# Altium PCB ESP-RC-Car.PcbDoc (part 2 of 2)
Units mm, origin at the board's own origin, x right, y up, seen from the top; angles counter-clockwise.
Board outline 95.25 x 60.25 mm, 4 copper layers (Top Layer, Int1 (Signal), Int2 (GND), Bottom Layer(PWR)), stack 1.586 mm thick; 116 components, 100 nets, 419 pads, 832 vias.
Unrouted connection lines stored in the file: 3.
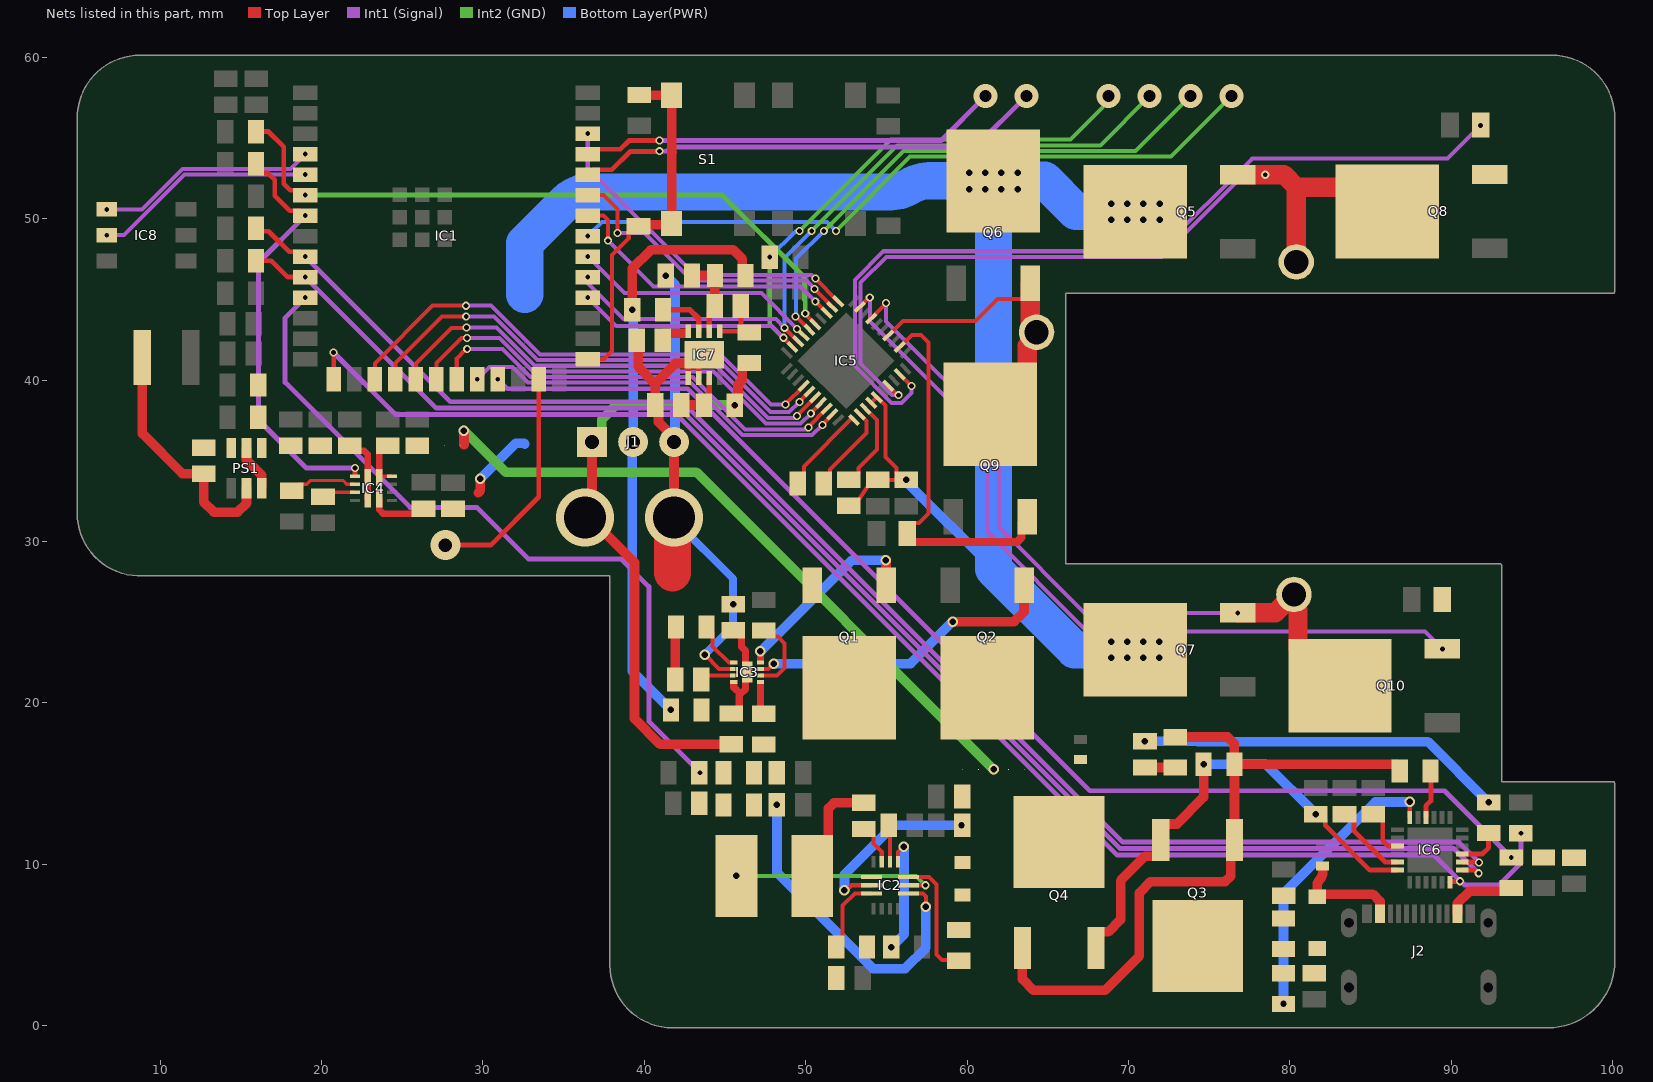
[diagram p4: the nets of this part, all layers, seen from the top]

## Via types
v1: diameter 0.5, hole 0.3, Top Layer to Bottom Layer(PWR), tented both sides, 751 vias
v2: diameter 0.65, hole 0.4, Top Layer to Bottom Layer(PWR), tented both sides, 63 vias
v3: diameter 1.5, hole 0.75, Top Layer to Bottom Layer(PWR), 8 vias
v4: diameter 5, hole 3.4, Top Layer to Bottom Layer(PWR), 5 vias
v5: diameter 1.85, hole 0.85, Top Layer to Bottom Layer(PWR), 3 vias
v6: diameter 3.6, hole 2.6, Top Layer to Bottom Layer(PWR), 2 vias

## Nets (pads, with @x,y where several pads share a name; then routed paths per layer and width w, separated by ;. In a path a pad name is that pad's centre, name@x,y a point inside that pad or via, vN(x,y) a via of type N, cw(c..) or ccw(c..) an arc to the next point about the centre after c; other vN are vias at no path point) (continued)
INHA: IC1.17 IC5.34 | length 32.1
  Top Layer w0.25: IC1.17@23.305,40.05 23.305,41.04 26.875,44.61 v1(28.95,44.61) ; v1@48.75,38.511 IC5.34@49.889,39.649
  Int1 (Signal) w0.25: v1(28.95,44.61) 30.51,44.61 33.53,41.59 44.74,41.59 47.841,38.489 v1(48.75,38.489)
INHB: IC1.19 IC5.36 | length 29.5
  Top Layer w0.25: IC1.19@25.845,40.05 25.845,41.035 28.051,43.241 28.961,43.241 v1(28.99,43.27) ; v1@49.455,37.801 IC5.36@50.596,38.942
  Int1 (Signal) w0.25: v1(28.99,43.27) 30.86,43.27 33.24,40.89 44.45,40.89 47.676,37.664 49.34,37.664 v1(49.455,37.779)
INHC: IC1.21 IC5.38 | length 27.1
  Top Layer w0.25: IC1.21@28.385,40.05 28.385,41.33 28.91,41.855 28.914,41.855 28.989,41.93 v1(29.03,41.93) ; v1(50.175,37.075) 50.175,37.107 IC5.38@51.303,38.235
  Int1 (Signal) w0.25: v1(29.03,41.93) 31.21,41.93 32.95,40.19 43.005,40.19 46.241,36.954 50.054,36.954 50.127,37.027 v1(50.175,37.075)
INLA: IC1.18 IC5.35 | length 30.9
  Top Layer w0.25: IC1.18@24.575,40.05 24.575,41.055 27.46,43.94 v1(28.97,43.94) ; v1(49.61,38.642) 49.61,38.664 IC5.35@50.242,39.296
  Int1 (Signal) w0.25: v1(28.97,43.94) 30.685,43.94 33.385,41.24 44.595,41.24 47.821,38.014 48.982,38.014 v1(49.61,38.642)
INLB: IC1.20 IC5.37 | length 28.2
  Top Layer w0.25: IC1.20@27.115,40.05 27.115,41.05 28.665,42.6 v1(29.01,42.6) ; v1(50.319,37.937) 50.319,37.959 IC5.37@50.949,38.589
  Int1 (Signal) w0.25: v1(29.01,42.6) 31.035,42.6 33.095,40.54 44.304,40.54 47.54,37.304 49.686,37.304 v1(50.319,37.937)
INLC: IC1.23 IC5.39 | length 24.6
  Top Layer w0.25: v1(51.034,37.227) 51.034,37.259 IC5.39@51.656,37.882
  Int1 (Signal) w0.25: v1(29.655,40.05) 30.425,40.82 31.825,40.82 32.805,39.84 42.86,39.84 46.1,36.6 50.407,36.6 v1(51.034,37.227)
IO0: C6.2 IC1.27 R2.2 S1.1 S1.3 | length 22.4
  Top Layer w0.25: IC1.27@36.5,41.3 36.501,41.301 37.506,41.301 37.995,41.79 37.995,47.745 39.04,48.79 39.04,49.155 39.425,49.54 C6.2@39.459,49.54
  Top Layer w0.6: C6.2@39.459,49.54 39.539,49.62 41.62,49.62 S1.1@41.7,49.7 41.7,54.095 41.72,54.115 41.7,54.135 S1.3@41.7,57.65 41.693,57.657 39.693,57.657 R2.2@39.686,57.664
LEDC: IC1.5 IC8.5 | length 13.9
  Int1 (Signal) w0.25: v1(6.7,48.98) 7.78,48.98 11.53,52.73 v1(19,52.73)
LEDD: IC1.4 IC8.4 | length 13.7
  Int1 (Signal) w0.25: v1(6.7,50.58) 8.885,50.58 11.385,53.08 18.08,53.08 v1(19,54)
MISO_DRV: IC1.33 IC5.26 | length 77.3
  Top Layer w0.25: v1(49.375,43.95) 49.406,43.95 IC5.26@50.242,43.114
  Int2 (GND) w0.25: v1(51.125,49.25) 56.075,54.2 70.443,54.2 v3(73.838,57.595) ; v1(51.875,49.25) 56.475,53.85 72.633,53.85 v3(76.378,57.595)
  Bottom Layer(PWR) w0.25: v1(36.5,48.92) 37.375,49.795 51.33,49.795 v1(51.875,49.25) ; v1(49.375,43.95) 49.4,43.975 49.4,47.525 v1(51.125,49.25)
MOSI_DRV: IC1.32 IC5.27 | length 15.4
  Top Layer w0.25: v1(49.474,43.175) IC5.27@49.889,42.761
  Int1 (Signal) w0.25: v1@36.515,47.665 38.78,45.4 47.251,45.4 v1@49.474,43.176
  other v1: 36.5,47.65
NetC5_1: C5.1 PS1.6
NetC5_2: C5.2 L1.2 PS1.2 | length 15.4
  Top Layer w0.6: L1.2@8.9,41.4 8.9,36.695 11.395,34.2 C5.2@12.705,34.2 12.705,32.445 13.33,31.82 14.805,31.82 15.355,32.37 PS1.2@15.355,33.3
NetC7_1: C7.1 IC2.14 | length 2.3
  Top Layer w0.25: C7.1@55.15,12.42 55.215,12.355 IC2.14@55.215,10.155
NetC9_2: C9.2 IC2.3 R3.2 | length 4.8
  Top Layer w0.25: R3.2@51.895,4.88 52.27,5.48 52.27,7.326 cw(c52.52,7.326) 52.343,7.503 53.045,8.205 IC2.3@54.065,8.205
NetC11_1: C11.1 IC2.15 | length 2.6
  Top Layer w0.25: C11.1@53.6,12.19 53.825,12.19 54.21,11.805 54.21,11.659 54.21,11.285 54.715,10.78 IC2.15@54.715,10.155
NetC11_2: C11.2 IC2.1 L2.2 | length 6.9
  Top Layer w0.6: L2.2@50.41,9.28 51.41,10.28 51.41,13.459 51.761,13.81 C11.2@53.6,13.81
NetC12_2: C12.2 C13.2 IC2.2 LED1.2 R30.2 | length 11.3
  Top Layer w0.25: v2(52.405,8.39) 52.513,8.39 52.828,8.705 IC2.2@54.065,8.705
  Bottom Layer(PWR) w0.6: v2(52.405,8.39) 52.405,9.375 55.45,12.42 v2(59.656,12.42)
NetC14_2: C14.2 IC3.8 IC3.9 R10.1 | length 7
  Top Layer w0.45: R10.1@45.385,19.34 45.61,19.34 45.885,19.615 45.885,20.466 45.97,20.551 ; C14.2@45.51,24.49 45.735,24.49 46.02,24.205 46.02,23.485 46.275,23.23 46.275,22.005 IC3.9@46.375,21.905 46.275,21.805 46.275,20.856 45.97,20.551 ; IC3.8@45.55,21.185 45.55,20.971 45.97,20.551
NetC17_2: C17.2 IC3.7 R13.1 | length 2.1
  Top Layer w0.25: C17.2@43.54,21.455 43.925,21.705 45.45,21.705 IC3.7@45.55,21.705
NetC19_1: C19.1 D3.1 Q4.2 R20.2 R33.2 | length 22.9
  Bottom Layer(PWR) w0.6: v2(71.02,17.62) 74.281,17.62 74.301,17.6 88.545,17.6 v2(92.31,13.835)
NetC19_2: C19.2 R21.1 | length 1.9
  Top Layer w0.6: C19.2@71.02,16 71.025,15.995 72.905,15.995 R21.1@72.91,15.99
NetC20_1: C20.1 C21.1 IC4.6 IC4.7 R32.1 | length 3.1
  Top Layer w0.2: IC4.7@23.575,33.975 23.65,34.05 IC4.6@24.375,34.05
  Top Layer w0.4: IC4.7@23.575,33.975 23.575,35.63 23.885,35.94 C21.1@24.069,35.94
NetC22_2: C22.2 IC6.24 Q3.3 Q4.3 R19.2 | length 30.1
  Top Layer w0.3: C22.2@81.83,13.11 82.19,12.75 82.19,12.41 84.96,9.64 IC6.24@86.68,9.64
  Top Layer w0.6: Q4.3@67.995,4.82 67.995,5.59 68.225,5.82 68.755,5.82 69.52,6.585 69.52,8.991 71.034,10.505 71.773,10.505 72.003,10.735 72.003,12.275 72.233,12.505 73.003,12.505 74.66,14.162 v2(74.66,16.21)
  Bottom Layer(PWR) w0.6: v2(74.66,16.21) 78.505,16.21 v2(81.605,13.11)
NetC23_1: C23.1 C24.1 IC4.1 IC4.8 R34.2 | length 4.1
  Top Layer w0.4: C24.1@21.75,35.94 22.06,35.63 22.641,35.63 22.875,35.396 IC4.1@22.875,32.625
NetC25_1: C25.1 D1.1 R18.1 R22.2
NetC26_1: C26.1 IC6.23 | length 4.9
  Top Layer w0.3: C26.1@83.385,13.11 83.61,13.11 83.97,12.75 83.97,12.095 85.925,10.14 IC6.23@86.68,10.14
NetC27_1: C27.1 C28.1 IC4.2 R35.2 | length 3.6
  Top Layer w0.4: IC4.2@23.575,32.625 23.575,31.969 23.809,31.735 26.02,31.735 C28.1@26.325,32.04
NetC29_2: C29.2 IC6.21 | length 3.1
  Top Layer w0.3: C29.2@85.165,13.11 85.39,13.11 85.75,12.75 85.75,11.465 86.075,11.14 IC6.21@86.68,11.14
NetC30_2: C30.2 IC4.11 | length 2.1
  Top Layer w0.2: C30.2@20.1,32.65 20.5,33.05 IC4.11@22.075,33.05
NetC31_1: C31.1 IC5.2 | length 5.6
  Top Layer w0.25: C31.1@51.12,33.595 51.505,33.98 51.505,34.46 53.77,36.725 53.77,37.465 IC5.2@53.354,37.882
NetC31_2: C31.2 IC5.1 | length 5.6
  Top Layer w0.25: C31.2@49.5,33.595 49.885,33.98 49.885,34.65 52.882,37.647 IC5.1@53,37.528
NetC32_2: C32.2 IC5.3 | length 5.6
  Top Layer w0.25: C32.2@52.675,33.825 52.9,33.825 53.285,34.21 53.285,34.555 54.425,35.695 54.425,37.517 IC5.3@53.707,38.235
NetC37_1: C37.1 C38.2 IC7.2 R41.1 | length 5
  Top Layer w0.35: IC7.2@44.03,43.03 44.03,44.205 C37.1@44.37,44.545 ; C37.1@44.365,44.595 C37.1@44.37,44.6 ; R41.1@44.37,46.48 R41.1@44.375,46.485
  Top Layer w0.6: C38.2@42.96,46.48 42.962,46.483 44.373,46.483 R41.1@44.375,46.485 ; C37.1@44.37,44.6 R41.1@44.37,46.48
NetC37_2: C37.2 IC7.1 R39.1 | length 3.8
  Top Layer w0.3: IC7.1@44.68,43.03 46.43,43.03 R39.1@46.505,42.955 46.335,42.955 45.985,43.305 C37.2@45.985,44.595
NetC39_2: C39.2 IC7.4 | length 1.4
  Top Layer w0.6: C39.2@41.245,42.905 IC7.4@42.6,42.905
NetC40_2: C40.2 IC7.7 R40.2 | length 3.2
  Top Layer w0.35: R40.2@43.705,38.455 44.03,38.78 IC7.7@44.03,40.13
  Top Layer w0.6: C40.2@42.295,38.465 42.3,38.46 43.7,38.46 R40.2@43.705,38.455
NetIC2_10: IC2.10 L2.1 R6.1 | length 13
  Top Layer w0.25: IC2.10@56.365,8.705 v1(57.415,8.705)
  Int2 (GND) w0.25: v2(45.71,9.28) 56.84,9.28 v1(57.415,8.705)
NetIC2_11: IC2.11 R8.1 | length 7.8
  Top Layer w0.25: IC2.11@56.365,9.205 57.645,9.205 58.1,8.75 58.1,4.415 58.451,4.064 59.461,4.064 R8.1@59.495,4.03
NetIC2_13: IC2.13 R3.1 R4.2 | length 7.7
  Top Layer w0.25: IC2.13@55.715,10.155 55.715,10.764 56.046,11.095 v2(56.09,11.095)
  Bottom Layer(PWR) w0.6: v2(55.31,4.875) 55.31,4.889 56.09,5.669 v2(56.09,11.095)
NetIC3_1: IC3.1 R12.1 | length 1.9
  Top Layer w0.45: IC3.1@47.2,21.19 47.2,19.525 R12.1@47.395,19.33
NetIC3_2: IC3.2 R16.2 | length 4.8
  Top Layer w0.25: IC3.2@47.2,21.705 48.23,21.705 48.695,22.17 48.695,23.695 48.283,24.107 47.773,24.107 R16.2@47.4,24.48
NetIC3_3: IC3.3 Q2.1 | length 19.4
  Top Layer w0.25: IC3.3@47.2,22.105 47.684,22.105 48.009,22.43 v2(48.015,22.43)
  Top Layer w0.6: v2(59.1,25.035) 62.92,25.035 63.526,25.641 63.526,27.281 Q2.1@63.535,27.29
  Bottom Layer(PWR) w0.6: v2(48.015,22.43) 56.495,22.43 v2(59.1,25.035)
NetIC3_4: IC3.4 Q1.1 | length 12.2
  Top Layer w0.45: 47.2,22.63 v2(47.2,23.19)
  Top Layer w0.6: v2(54.97,28.84) 54.977,28.833 54.977,27.297 Q1.1@54.985,27.29
  Bottom Layer(PWR) w0.6: v2(47.2,23.19) 52.85,28.84 v2(54.97,28.84)
NetIC3_5: IC3.5 Q1.3 R17.1 | length 3.1
  Top Layer w0.25: R17.1@43.865,24.705 44.24,24.33 44.24,23.51 45.245,22.505 IC3.5@45.55,22.505
NetIC4_10: IC4.10 R24.2 | length 4.3
  Top Layer w0.2: R24.2@18.15,33.15 18.55,33.55 19.095,33.55 19.33,33.785 21.335,33.785 21.57,33.55 IC4.10@22.075,33.55
NetIC6_9: IC6.9 R20.1 | length 2.7
  Top Layer w0.3: IC6.9@90.68,10.64 91.91,10.64 92.31,11.04 R20.1@92.31,11.935
NetIC6_16: IC6.16 R23.1 | length 3.5
  Top Layer w0.3: IC6.16@88.43,12.89 88.43,13.625 88.74,13.935 88.74,16.175 R23.1@88.705,16.21
NetIC6_18: IC6.18 R22.1 | length 18
  Top Layer w0.3: IC6.18@87.43,12.89 v2(87.43,13.865)
  Bottom Layer(PWR) w0.6: v2(79.605,1.355) 79.605,8.18 85.29,13.865 v2(87.43,13.865)
NetIC7_3: IC7.3 R42.1 | length 3.2
  Top Layer w0.35: R42.1@41.155,44.355 42.83,44.355 43.38,43.805 IC7.3@43.38,43.03
NetLED1_1: LED1.1 R8.2
NetPS1_4: PS1.4 R1.1 R5.2 | length 0
  Top Layer w0.6: R1.1@16.09,39.7 R1.1@16.095,39.695
NetQ1_2: Q1.2 Q2.2
NetQ3_1: Q3.1 Q4.1 R19.1 R21.2 R23.2 | length 42.4
  Top Layer w0.6: Q4.1@63.423,4.82 63.423,2.882 64.11,2.195 68.55,2.195 70.67,4.315 70.67,8.235 71.365,8.93 75.994,8.93 76.345,9.281 76.345,11.275 Q3.1@76.575,11.505 R19.1@76.575,16.055 ; R21.2@72.91,17.89 76.14,17.89 76.546,17.484 R19.1@76.546,16.224 ; R19.1@76.56,16.21 R23.2@86.7,16.21
NFAULT: IC1.6 IC5.25 R25.2 | length 42.2
  Top Layer w0.25: v1(49.974,44.124) 49.974,44.089 IC5.25@50.596,43.468
  Top Layer w0.3: R25.2@15.945,55.4 R25.2@15.945,55.4 16.719,55.399 17.67,54.448 17.67,52.17 18.08,51.76 18.7,51.76 v1(19,51.46)
  Int2 (GND) w0.3: v1(19,51.46) 44.83,51.46 49.929,46.361 49.929,44.974 49.974,44.929 v1(49.974,44.124)
PWM_Servo: IC1.25 | length 14.3
  Top Layer w0.3: v5(27.68,29.775) 30.48,29.775 33.465,32.76 IC1.25@33.465,40.05
RESET: IC1.15 IC6.6 R26.2 | length 92
  Top Layer w0.3: v1(20.75,41.71) 20.765,41.695 IC1.15@20.765,40.05 ; IC6.6@89.93,8.89 89.93,8.936 90.531,8.936 v1(90.55,8.955)
  Int1 (Signal) w0.3: v1(20.75,41.71) 24.595,37.865 42.02,37.865 69.31,10.575 88.93,10.575 v1(90.55,8.955) 90.596,8.955 90.826,8.725 92.97,8.725 94.31,10.065 v1(94.31,11.93)
RXD: IC1.36 | length 29.2
  Top Layer w0.3: IC1.36@36.5,52.73 36.8,53.03 38,53.03 39.135,54.165 40.93,54.165 v1@40.95,54.185
  Int1 (Signal) w0.3: v1(40.945,54.185) 41.385,54.185 41.645,54.445 60.505,54.445 63.655,57.595 v3(63.678,57.595)
SCL: IC1.10 IC6.7 R9.2 | length 92.6
  Top Layer w0.3: R9.2@15.945,47.395 16.895,47.395 17.91,46.38 v1(19,46.38) ; IC6.7@90.68,9.64 91.456,9.64 91.646,9.45 v1(91.7,9.45)
  Int1 (Signal) w0.3: v1(19,46.38) 27.115,38.265 42.19,38.265 69.48,10.975 90.168,10.975 91.693,9.45 v1(91.7,9.45)
SCLK: IC1.31 IC5.28 | length 46
  Top Layer w0.25: v1(48.7,43.242) IC5.28@49.535,42.407
  Int1 (Signal) w0.25: v1(36.5,46.38) 36.5,46.015 38.725,43.79 48.154,43.79 v1(48.7,43.242)
  Int2 (GND) w0.25: v1(50.375,49.25) 55.675,54.55 68.253,54.55 v3(71.298,57.595)
  Bottom Layer(PWR) w0.25: v1(48.7,43.242) 48.7,47.575 v1(50.375,49.25)
SDA: IC1.9 IC6.8 R11.2 | length 93.1
  Top Layer w0.3: R11.2@15.945,49.4 16.119,49.226 16.719,49.226 17.995,47.95 18.7,47.95 v1(19,47.65) ; IC6.8@90.68,10.14 91.71,10.14 v1(91.725,10.125)
  Int1 (Signal) w0.3: v1(19,47.65) 27.985,38.665 42.36,38.665 69.65,11.375 90.475,11.375 v1(91.725,10.125)
SHA: IC5.7 pad.6@80.4,47.32 Q5.3 Q8.2 | length 51.7
  Top Layer w0.25: IC5.7@55.121,39.649 55.703,39.067 v1(55.744,39.067)
  Top Layer w1.2: Q5.3@76.775,52.73 78.47,52.73 v1(78.475,52.725) 78.48,52.73 79.629,52.73 80.4,51.959 ; pad.6@80.4,47.32 80.4,51.959 ; Q8.2@86.025,50.45 84.516,51.959 80.4,51.959
  Int1 (Signal) w0.25: v1(55.744,39.067) 55.358,39.067 53.4,41.025 53.4,46.04 54.995,47.635 72.06,47.635 77.15,52.725 v1(78.475,52.725)
SHB: IC5.14 pad.6@64.305,42.97 Q6.3 Q9.2 | length 19.9
  Top Layer w0.25: IC5.14@55.121,42.761 56.036,43.675 60.535,43.675 61.875,45.015 63.445,45.015 63.92,45.49 Q6.3@63.92,45.99
  Top Layer w1.2: Q9.2@61.44,37.89 63.74,40.19 63.74,42.134 64.305,42.699 64.305,43.241 63.92,43.626 63.92,45.015 Q6.3@63.92,45.99
SHC: IC5.17 pad.6@80.25,26.72 Q7.3 Q10.2 | length 46.1
  Top Layer w0.25: IC5.17@54.061,43.821 54.972,44.733 v1(54.972,44.768)
  Top Layer w1.2: v1(76.77,25.58) 79.085,25.58 80.225,26.72 pad.6@80.25,26.72 80.441,26.529 80.441,25.822 80.5,25.763 80.5,23.36 82.8,21.06 Q10.2@83.1,21.06
  Int1 (Signal) w0.25: v1(54.972,44.768) 54.972,43.643 61.965,36.65 61.965,30.9 67.285,25.58 v1(76.77,25.58)
SOA: IC1.34 IC5.23 | length 18
  Top Layer w0.25: IC1.34@36.5,50.19 36.504,50.186 37.479,50.186 37.755,49.91 v1(37.755,48.64) ; v1(50.598,44.867) 50.61,44.867 IC5.23@51.303,44.175
  Int1 (Signal) w0.25: v1(37.755,48.64) 40.585,45.81 49.656,45.81 50.137,45.329 v1(50.598,44.867)
SOB: IC1.35 IC5.22 | length 18.9
  Top Layer w0.25: IC1.35@36.5,51.46 37.48,51.46 38.35,50.59 v1(38.35,49.12) ; v1(50.549,45.651) 50.549,45.635 IC5.22@51.656,44.528
  Int1 (Signal) w0.25: v1(38.35,49.12) 40.01,49.12 42.97,46.16 50.054,46.16 50.549,45.664 v1(50.549,45.651)
SOC: IC1.38 IC5.21 | length 21.1
  Top Layer w0.25: v1(50.6,46.3) 50.6,46.292 IC5.21@52.01,44.882
  Int1 (Signal) w0.25: v1(36.5,55.27) 36.5,53.14 43.13,46.51 50.349,46.51 50.559,46.3 v1(50.6,46.3)
SPA: IC5.9 Q8.3 R27.2 | length 54.2
  Top Layer w0.25: IC5.9@55.828,40.356 56.547,39.638 v1(56.563,39.638)
  Int1 (Signal) w0.25: v1(56.563,39.638) 56.55,39.625 56.55,39.197 55.945,38.592 55.333,38.592 53.05,40.875 53.05,46.205 54.83,47.985 71.915,47.985 77.67,53.74 89.78,53.74 v1(91.82,55.78)
SPB: IC5.12 Q9.3 R28.2 | length 23.7
  Top Layer w0.25: IC5.12@55.828,42.054 56.575,42.8 57.158,42.8 57.625,42.333 57.625,31.745 57.02,31.14 56.72,31.14 56.295,30.715 R28.2@56.295,30.49
  Top Layer w0.5: R28.2@56.295,30.49 56.295,30.265 56.595,29.965 63.087,29.965 63.38,30.258 63.38,31.2 Q9.3@63.615,31.435
SPC: IC5.19 Q10.3 R29.2 | length 49.6
  Top Layer w0.25: IC5.19@53.354,44.528 53.935,45.11 v1(53.97,45.11)
  Int1 (Signal) w0.25: v1(53.97,45.11) 53.998,45.083 53.998,43.627 61.265,36.36 61.265,30.61 67.435,24.44 88.36,24.44 v1(89.45,23.35)
SS: IC1.30 IC5.29 R46.2 | length 44.6
  Top Layer w0.25: v1(48.625,42.625) 48.625,42.61 IC5.29@49.182,42.054
  Int1 (Signal) w0.25: v1(36.5,45.11) 38.265,43.345 47.905,43.345 v1(48.625,42.625)
  Int2 (GND) w0.25: v1(47.775,47.62) 47.775,43.461 48.611,42.625 v1(48.625,42.625) ; v1(49.625,49.25) 55.275,54.9 66.4,54.9 68.758,57.258 v3(68.758,57.595)
  Bottom Layer(PWR) w0.25: v1(47.775,47.62) 49.357,49.202 49.577,49.202 v1(49.625,49.25)
ST: IC1.7 IC4.9 R15.1 | length 26.6
  Top Layer w0.3: R15.1@15.945,53.405 15.945,53.18 16.295,52.83 16.685,52.83 17.11,52.405 17.11,51.42 18.04,50.49 18.7,50.49 v1(19,50.19) ; IC4.9@22.077,34.12 v1(22.077,34.558)
  Int1 (Signal) w0.3: v1(19,50.19) 16.1,47.29 16.1,37.53 19.072,34.558 v1(22.077,34.558)
TXD: IC1.37 | length 26.1
  Top Layer w0.3: IC1.37@36.5,54 36.8,54.3 38.52,54.3 39.065,54.845 v1(40.945,54.845)
  Int1 (Signal) w0.3: v1(40.945,54.845) 58.388,54.845 v3(61.138,57.595)
VBAT+: C15.2 C16.2 IC2.9 J1.1 R6.2 R10.2 R12.2 R31.1 R39.2 R40.1 R43.2 | length 58.7
  Top Layer w0.25: IC2.9@56.365,8.205 57.259,8.205 57.444,8.02 v2(57.444,7.381)
  Top Layer w0.6: 36.76,35.215 36.76,31.92 v6(36.34,31.5) 36.605,31.5 39.4,28.705 39.4,19.025 40.985,17.44 R10.2@45.385,17.44 ; R40.1@45.605,38.455 45.805,38.655 45.805,39.72 46.08,39.995 46.08,40.855 46.28,41.055 R39.2@46.505,41.055
  Int2 (GND) w0.6: J1.1@36.705,36.17 36.705,36.105 J1.1@36.77,36.17 ; J1.1@37.376,35.946 37.376,37.571 38.26,38.455 v2(45.611,38.455)
  Bottom Layer(PWR) w0.6: v2(48.22,13.69) 48.22,9.485 54.17,3.535 56.155,3.535 57.444,4.824 v2(57.444,7.381)
VBAT-: C14.1 C17.1 C38.1 C39.1 C40.1 IC3.6 IC7.5 IC7.6 IC7.9 J1.3 R17.2 | length 47.7
  Top Layer w0.25: v2(43.75,23) 44.645,22.105 IC3.6@45.55,22.105
  Top Layer w0.35: IC7.5@42.73,40.13 42.73,40.949 IC7.9@42.9,41.119 ; IC7.6@43.38,40.13 IC7.9@43.38,41.255
  Top Layer w0.6: C39.1@39.62,42.47 39.62,40.83 40.675,39.775 ; C40.1@40.675,38.24 40.675,39.775 ; C40.1@40.675,38.465 40.885,38.255 40.885,37.405 41.85,36.44 J1.3@41.85,36.17 ; v6@41.845,31.275 J1.3@41.845,35.331 ; C17.1@41.92,21.455 41.92,24.596 cw(c42.074,24.596) R17.2@41.965,24.705 ; IC7.9@42.73,41.045 IC7.9@43.17,41.045 ; IC7.9@43.705,41.58 43.38,41.255 43.155,41.03 41.93,41.03 40.675,39.775
  Top Layer w2.3: 41.75,28.07 41.75,31.18 v6@41.845,31.275
  Bottom Layer(PWR) w0.5: v6@41.845,31.275 41.925,31.275 45.51,27.69 v2(45.51,26.11) 45.51,24.76 v2(43.75,23)
  Bottom Layer(PWR) w0.6: v2(41.34,46.48) 41.904,45.916 J1.3@41.904,36.17
  other v6: 41.845,31.5
VBATADC: C41.2 IC1.11 R43.1 R44.2 | length 46.4
  Int1 (Signal) w0.3: v1@18.984,45.094 17.75,43.86 17.75,39.86 25.495,32.115 29.63,32.115 32.835,28.91 38.585,28.91 40.285,27.21 40.285,18.86 v1(43.465,15.68)
  other v1: 19,45.11
VBATJ: R31.2 R35.1 R36.1 | length 4.6
  Top Layer w0.6: R35.1@29.72,33.03 29.844,33.154 29.844,33.887 v2(29.853,33.897)
  Bottom Layer(PWR) w0.6: v2(29.853,33.897) 32.05,36.093 32.547,36.093 R31.2@32.595,36.045
VBATM: J1.2 R13.2 R41.2 R42.2 | length 37
  Top Layer w0.6: v2(39.255,44.355) 39.255,46.915 40.41,48.07 45.515,48.07 46.075,47.51 46.075,46.685 R41.2@46.275,46.485
  Bottom Layer(PWR) w0.6: J1.2@39.255,36.17 39.255,35.261 39.261,35.255 39.261,21.954 v2(41.65,19.565) ; v2(39.255,44.355) 39.255,44.341 39.31,44.286 J1.2@39.31,36.17
VBUS: C18.1 D1.2 D2.1 J2.A4_B9 J2.B4_A9 Q3.2 R18.2 R37.2 | length 11.1
  Top Layer w0.6: D2.1@82.03,9.785 82.03,9.484 cw(c81.43,9.484) 81.866,9.071 81.854,9.059 ccw(c82.29,8.646) 81.69,8.646 81.69,8.15 D1.2@81.705,7.99 81.865,8.15 85.14,8.15 85.58,7.71 J2.A4_B9@85.58,6.95 ; J2.B4_A9@90.38,6.95 90.38,7.591 91.114,8.325 93.515,8.325 R37.2@93.715,8.525
VBUSADC: C36.2 IC1.22 R37.1 R38.2 | length 75.1
  Int1 (Signal) w0.3: v1(30.925,40.05) 31.51,39.465 42.7,39.465 67.605,14.56 89.58,14.56 v1(93.715,10.425)
VDRAIN: C32.1 C33.2 C34.2 IC5.4 IC5.5 Q5.2 Q6.2 Q7.2 R36.2 | length 93.5
  Top Layer w0.25: C32.1@52.675,32.205 53.285,32.59 53.85,33.435 53.897,33.512 54.205,33.82 C33.2@54.46,33.82 56.015,33.82 55.63,34.205 55.63,34.545 54.94,35.235 54.94,38.416 IC5.5@54.414,38.942 IC5.4@54.061,38.589
  Bottom Layer(PWR) w0.6: v2(56.24,33.82) 56.25,33.81 56.25,33.695 61.63,28.315
  Bottom Layer(PWR) w2.3: R36.2@32.595,45.305 32.595,48.48 35.108,50.993 cw(c36.731,49.364) 35.109,50.994 cw(c36.733,49.365) 35.353,51.205 cw(c36.733,49.365) 36.733,51.665 55.238,51.665 ccw(c55.234,53.965) 56.315,51.935 56.319,51.937 56.585,52.079 cw(c57.668,50.05) 57.668,52.35 59.62,52.35 ; 59.689,52.35 cw(c59.686,50.05) v2(61.13,51.84) 61.63,51.34 61.63,28.315 66.655,23.29 70.42,23.29 ; 62.56,52.41 64.78,52.41 66.75,50.44 69.425,50.44
  other v2: 68.92,22.79 69.92,22.79 70.92,22.79 71.92,22.79 68.92,23.79 69.92,23.79 70.92,23.79 71.92,23.79 68.925,49.94 69.925,49.94 70.925,49.94 71.925,49.94 68.925,50.94 69.925,50.94 70.925,50.94 71.925,50.94 60.13,51.84 62.13,51.84 63.13,51.84 60.13,52.84 61.13,52.84 62.13,52.84 63.13,52.84
VMCU: C8.2 PS1.3 PS1.5 R34.1 | length 2.9
  Top Layer w0.6: PS1.5@15.355,35.8 15.355,35.05 16.305,34.1 PS1.3@16.305,33.3
VSYS: R30.1 R32.2 R33.1 | length 42.4
  Top Layer w0.6: 28.83,35.995 v2(28.83,36.875)
  Int2 (GND) w0.6: v2(28.83,36.875) 31.41,34.295 43.225,34.295 v2(61.64,15.88)
pads on no net: IC1.16 IC1.24 IC1.26 IC1.39 IC2.4 IC2.5 IC2.7 IC2.12 IC6.3 IC6.11 IC6.14 IC6.15 IC6.17 IC6.20 IC7.8 IC8.2 IC8.3 J2.A8 J2.B8

## Polygon pours and split planes (outlines as drawn)
no net on Mechanical 16 "NONET_L01_P000" (solid): 66,45.5 66,28.5 93,28.5 93,45.5
no net on Mechanical 16 "NONET_L-01_P-001" (solid): 0,0 0,25 35,25 35,0
no net on Mechanical 16 "NONET_L-01_P-001" (solid): 93,45 93,15 100,15 100,45
NetIC2_10 on Top Layer "NONET_L-01_P-001" (solid, pour order 49): 44.41,14.405 45.41,14.405 45.41,12.855 ccw(c46.33,12.855) 46.33,11.935 47.01,11.935 47.01,6.73 44.41,6.73
GND on Top Layer "GND_L01_P082" (solid, remove dead copper, pour order 82): 0,60 101,60 101,0 38,0 38,28 0,28
VBAT+ on Top Layer "NONET_L-01_P-001" (solid, pour order 69): 46.31,16.51 46.31,12.955 48.73,12.955 48.73,16.51 48.435,16.51 cw(c48.435,16.825) 48.12,16.825 48.12,17.93 46.215,17.93 46.215,17.94 44.66,17.94 44.66,16.94 45.88,16.94 cw(c45.88,16.51)
NetIC3_5 on Top Layer "NONET_L-01_P-001" (solid, pour order 67): 44.365,23.98 44.365,26.205 cw(c45.32,26.205) 45.32,27.16 48.835,27.16 cw(c48.835,26.19) 49.805,26.19 51.006,26.191 51.005,28.39 51.005,28.495 ccw(c48.505,28.495) 48.505,30.995 47.095,30.995 ccw(c47.095,30.786) 47.09,30.995 cw(c47.095,30.778) 47.095,30.995 45.905,30.995 ccw(c45.905,28.455) 43.365,28.455 43.365,23.98
NetC27_1 on Top Layer "NONET_L-01_P-001" (solid, pour order 45): 25.59,31.53 25.59,32.545 28.995,32.545 29.069,32.619 ccw(c28.958,32.73) 29.115,32.73 29.22,32.73 29.72,32.23 29.72,31.53 29,31.53 28.995,31.525
NetC9_2 on Top Layer "NONET_L-01_P-001" (solid, pour order 42): 51.395,5.605 52.395,5.605 52.395,3.843 ccw(c52.463,3.843) 52.415,3.795 52.415,2.22 51.395,2.22
VBUS on Top Layer "VBUS_L01_P027" (solid, pour order 27): 82.245,7.53 82.245,8.45 81.06,8.45 80.455,8.57 78.78,8.57 cw(c77.356,9.397) 77.778,7.805 71.475,7.805 71.475,2.105 77.105,2.105 77.105,3.66 cw(c79.187,4.068) 78.78,6.15 80.33,6.15 80.33,6.8 cw(c81.06,6.8) 81.06,7.53
SPC on Top Layer "SPC_L01_P080" (solid, pour order 80): 88.35,22.75 90.55,22.75 90.55,24.055 cw(c91.89,25.395) 89.995,25.395 89.995,27.18 88.895,27.18 88.895,25.371 cw(c87.034,25.371) 88.35,24.055
SPA on Top Layer "SPA_L01_P079" (solid, pour order 79): 91.275,56.57 91.275,52.14 93.475,52.14 93.475,53.445 92.637,54.283 cw(c93.268,54.915) 92.375,54.915 92.375,56.57
VBAT- on Top Layer "NONET_L-01_P-001" (solid, pour order 71): 41.465,23.98 42.465,23.98 42.465,25.535 ccw(c41.415,26.585) 42.9,26.585 42.9,28.07 40.6,28.07 40.6,27.235 ccw(c43.127,27.461) 41.334,25.666 41.465,25.535
NetC17_2 on Top Layer "NONET_L-01_P-001" (solid, pour order 61): 44.965,21.831 cw(c45.024,23.059) 44.155,22.19 43.03,22.19 43.03,20.615 cw(c42.982,20.567) 43.05,20.567 43.05,18.84 43.055,18.845 44.05,18.845 44.05,20.72 44.155,20.72 cw(c44.99,20.745) 44.965,21.58
NetQ1_2 on Top Layer "NONET_L-01_P-001" (solid, pour order 58): 49.795,24.14 64.145,24.14 64.145,17.74 49.795,17.74
VBATADC on Top Layer "NONET_L-01_P-001" (solid, pour order 57): 42.91,13.055 43.93,13.055 43.93,14.63 cw(c43.978,14.678) 43.91,14.678 43.91,14.955 45.41,14.955 45.41,16.405 42.91,16.405
NetC11_2 on Top Layer "NONET_L-01_P-001" (solid, pour order 46): 49.11,6.73 49.11,11.83 51.815,11.83 51.815,10.825 ccw(c53.31,10.825) 53.31,9.33 54.715,9.33 54.715,9.08 52.389,9.08 ccw(c52.389,8.502) 51.81,8.502 51.81,6.83 cw(c51.71,6.83) 51.71,6.73
NetC20_1 on Top Layer "NONET_L-01_P-001" (solid, pour order 43): 23.435,36.45 23.435,35.43 26.78,35.43 cw(c26.816,35.394) 26.816,35.445 27.63,35.445 27.63,36.445 27.025,36.445 26.78,36.45
NetIC2_13 on Top Layer "NONET_L-01_P-001" (solid, pour order 41): 53.295,5.605 55.8,5.605 55.8,4.155 53.295,4.155
NetLED1_1 on Top Layer "NONET_L-01_P-001" (solid, pour order 39): 59.22,8.505 60.22,8.505 60.22,5.43 58.77,5.43 58.77,6.535 58.785,6.55 ccw(c57.735,7.6) 59.22,7.6
NetC12_2 on Top Layer "NONET_L-01_P-001" (solid, remove dead copper, pour order 37): 59.22,9.705 60.22,9.705 60.22,15.085 cw(c60.41,15.085) 60.41,15.275 60.41,15.38 59.91,15.88 59.21,15.88 59.21,15.275 59.2,15.04 59.2,11.58 cw(c59.152,11.532) 59.22,11.532 59.22,10.61
VSYS on Top Layer "VSYS_L01_P033" (solid, pour order 33): 60.71,16.38 62.57,16.38 62.57,15.38 60.71,15.38
NetC19_1 on Top Layer "NETC19_1_L01_P032" (solid, pour order 32): 68.525,8.52 68.525,14.325 cw(c73.07,13.508) 70.18,17.11 71.755,17.11 71.755,18.13 70.18,18.13 cw(c63.475,27.907) 67.525,16.765 66.515,16.765 cw(c65.586,17.694) 65.586,16.38 63.285,16.38 63.418,16.247 cw(c63.051,15.88) 63.57,15.88 ccw(c63.57,15.398) 63.229,15.739 62.87,15.38 cw(c35.234,14.329) 62.89,14.325 62.89,8.52
3V3 on Top Layer "3V3_L01_P029" (solid, pour order 29): 11.35,43.1 12.555,43.1 ccw(c12.555,44.11) 13.565,44.11 13.565,44.235 14.69,44.235 14.69,38.975 13.585,38.975 ccw(c12.86,38.975) 12.86,39.7 11.35,39.7
VMCU on Top Layer "VMCU_L01_P028" (solid, pour order 28): 18.835,36.45 18.835,35.33 18.818,35.313 ccw(c18.886,35.245) 18.79,35.245 18.79,34.14 16.871,34.14 ccw(c16.87,33.765) 16.605,34.03 16.59,34.03 ccw(c16.363,33.721) 16.305,34.1 15.745,34.805 15.91,34.91 ccw(c16.43,35.845) 17.365,35.325 17.365,36.45
NetC25_1 on Top Layer "NETC25_1_L01_P023" (solid, pour order 23): 78.88,5.25 78.88,2.755 82.245,2.755 82.245,5.25
VBUSADC on Top Layer "NONET_L-01_P-001" (solid, pour order 18): 92.99,10.925 98.34,10.925 98.34,9.905 96.765,9.905 96.545,9.925 92.99,9.925
VBUS on Top Layer "VBUS_L01_P016" (solid, pour order 16): 90.08,7.425 90.08,6.175 89.08,5.175 86.88,5.175 85.88,6.175 85.88,7.425 85.28,7.425 85.28,6.175 85.28,3.145 90.68,3.145 90.68,6.175 90.68,7.425
NetC20_1 on Top Layer "NETC20_1_L01_P014" (solid, pour order 14): 23.435,36.45 26.675,36.45 26.675,35.43 23.435,35.43
NetC23_1 on Top Layer "NETC23_1_L01_P012" (solid, pour order 12): 19.09,35.14 19.14,35.09 20.285,35.09 20.29,35.085 20.29,35.245 21.125,35.43 21.275,35.43 22.48,35.43 22.485,35.435 22.485,36.45 19.19,36.45 19.19,35.325 19.09,35.245
NetPS1_4 on Top Layer "NETPS1_4_L01_P010" (solid, pour order 10): 15.59,40.425 16.59,40.425 16.585,40.42 16.59,36.87 16.605,36.525 16.605,35.175 16.005,35.175 16.005,36.53 15.59,36.87
NetC5_1 on Top Layer "NETC5_1_L01_P003" (solid, pour order 3): 11.97,36.33 13.545,36.33 14,36.425 14.705,36.425 14.705,35.175 14,35.175 13.545,35.31 11.97,35.31
VBATJ on Bottom Layer(PWR) "NONET_L-01_P-001" (solid, pour order 73): 31.095,35.795 34.095,35.795 34.095,42.805 31.095,42.805
VDRAIN on Bottom Layer(PWR) "VDRAIN_L04_P077" (solid, pour order 77): 72.925,48.94 67.925,48.94 67.925,51.94 72.925,51.94
VDRAIN on Bottom Layer(PWR) "VDRAIN_L04_P076" (solid, pour order 76): 64.13,50.84 59.13,50.84 59.13,53.84 64.13,53.84
VDRAIN on Bottom Layer(PWR) "VDRAIN_L04_P078" (solid, pour order 78): 72.92,21.79 67.92,21.79 67.92,24.79 72.92,24.79
VBAT+ on Bottom Layer(PWR) "NONET_L-01_P-001" (solid, pour order 72): 31.095,33.545 31.095,31.94 ccw(c33.335,31.94) 33.335,29.7 36.315,29.7 ccw(c36.315,29.725) 36.34,29.725 36.34,33.3 34.686,33.3 cw(c34.686,34.136) 34.095,33.545
GND on Int2 (GND) "GND_L03_P081" (solid, remove dead copper, pour order 81): 0,60 101,60 101,0 38,0 38,28 0,28

## Keep-outs
Keep-Out Layer:
  lines w0.254: 8.623,28.002 cw(c8.75,31.75) 5,31.75 5,56.25 cw(c8.75,56.25) 8.75,60 96.25,60 cw(c96.25,56.25) 100,56.25 100,54.25 100,45.5 93,45.5 66,45.5 66,28.5 93,28.5 93,15 100,15 100,5.67 100,5 ; 8.625,28 38,28 38,3.75 ccw(c41.75,3.75) 41.75,0 96,0 ccw(c96,4) 100,4 100,5 ; 100,5 100,5

## Other copper
Top Layer:
  pour cut-out: 56.825,39.525 58.112,40.812 56.745,42.087 55.431,40.849
  pour cut-out: 57.15,39.925 58.618,41.393 56.753,43.134 55.256,41.724
  pour cut-out: 53.148,43.873 54.788,45.513 53.962,46.284 52.279,44.698
Int2 (GND):
  pour cut-out: 53.402,45.75 cw(c53.902,45.75) 53.902,46.25 cw(c53.901,45.751) 54.4,45.75 cw(c53.901,45.749) 53.902,45.25 cw(c53.902,45.75)
  pour cut-out: 56.204,40.252 cw(c56.704,40.252) 56.704,40.752 cw(c56.703,40.253) 57.202,40.252 cw(c56.703,40.25) 56.704,39.752 cw(c56.704,40.252)
  pour cut-out: 56.546,42.243 cw(c57.046,42.243) 57.046,42.743 cw(c57.045,42.245) 57.543,42.243 cw(c57.045,42.242) 57.046,41.743 cw(c57.046,42.243)

## Silkscreen, mask and mechanical layers (free items; w line width, h text height)
Top Overlay:
  text "3V3" at 57.85,55.836 h1
  text "TXD" at 60.35,55.825 h1
  text "RXD" at 62.85,55.825 h1
  text "GND" at 65.25,55.836 h1
  text "SS" at 68.183,55.836 h1
  text "SCLK" at 70.129,55.836 h1
  text "MISO" at 72.726,55.836 h1
  text "MOSI" at 75.287,55.836 h1
  text "EN" at 50.3,49.5 h1
  text "IO0" at 43.4,49.461 h1
  text "Every machine can be utilised as a smoke machine if it is used wrong enough." at 20.295,42.55 h1.2
  text "GND" at 22.2,31.006 h0.5
  text "3V3" at 24.775,31.006 h0.5
  text "PWM" at 27.155,31 h0.5
  text "Why u looking / down here?" at 82.932,2.825 h1
Bottom Overlay:
  drawing of 29 lines, arcs and shapes, not listed
  text "ESP RC CAR / Mario Haunold / Leon Dillinger" at 53.77,1.245 h1.52